# Altium PCB PCB1.PcbDoc
Units mm, origin at the board's own origin, x right, y up, seen from the top; angles counter-clockwise.
Board outline 143 x 100 mm, 2 copper layers (Top Layer, Bottom Layer); 59 components, 57 nets, 310 pads, 0 vias.
Unrouted connection lines stored in the file: 164.
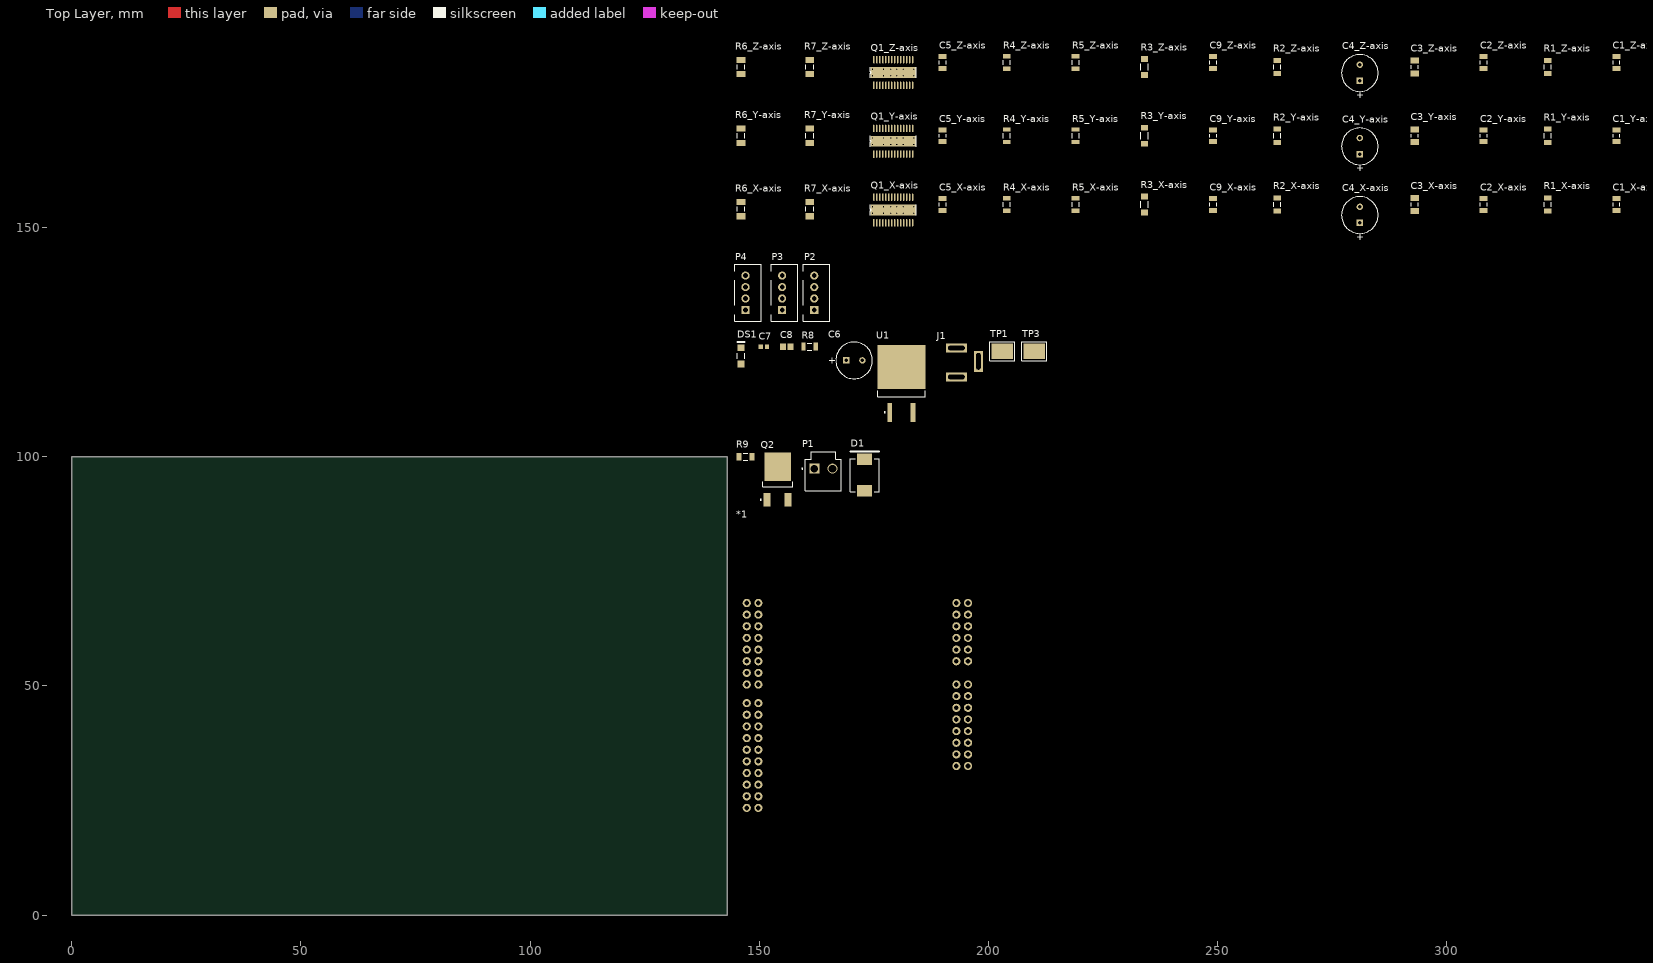
[diagram p0: Top Layer view]
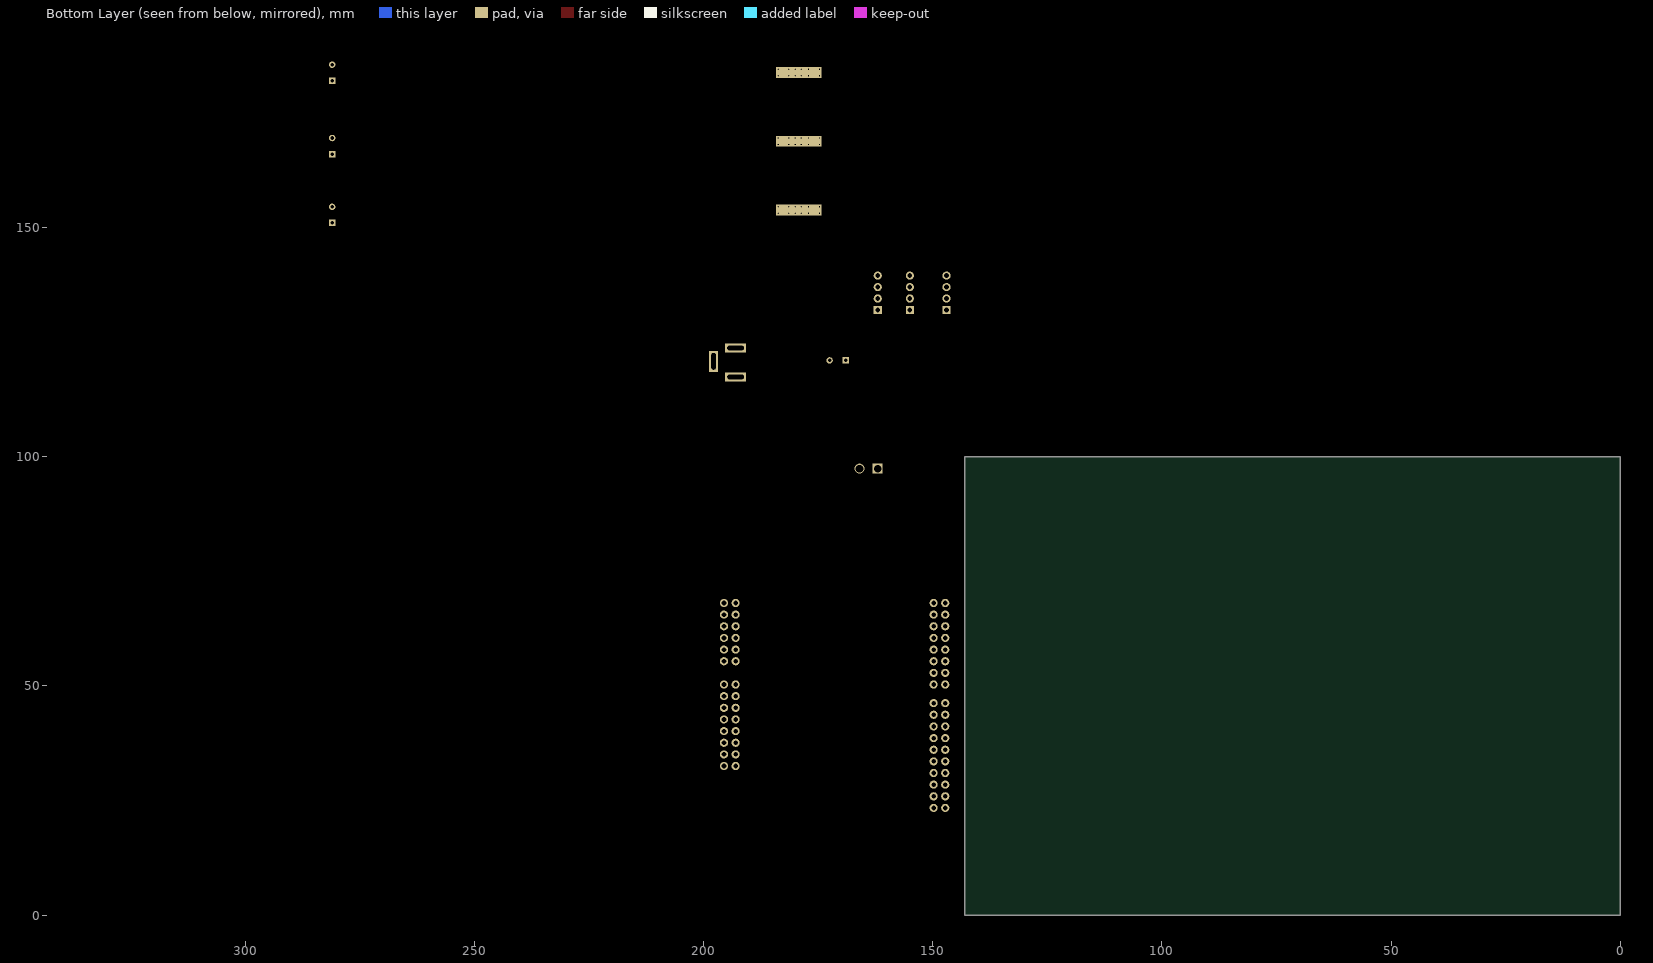
[diagram p1: Bottom Layer view, seen from below]

## Layer stack, top to bottom
Top Solder: solder mask 0.0102, Solder Resist, Dk 3.5
Top Layer: signal copper 0.0356
Dielectric 1: dielectric 0.32, FR-4, Dk 4.8
Bottom Layer: signal copper 0.0356
Bottom Solder: solder mask 0.0102, Solder Resist, Dk 3.5

## Board outline
0,100 143,100 143,0 0,0

## Design rules (kind name [scope] priority, off if disabled: settings)
Clearance [All] p1: gap=0.254 ignorepadtopadclearanceinfootprint=FALSE except(0: Arc-Hole Track-Hole SMDPad-Hole THPad-Hole Via-Hole Fill-Hole Poly-Hole Region-Hole Text-Hole)
PolygonConnect [All] p1: connectstyle=Relief reliefconductorwidth=0.254 reliefentries=4 polygonreliefangle="90 Angle" airgapwidth=0.254
RoomDefinition Z-axis [InComponentClass('Z-axis')] p1: confinementstyle=ConfineIn formatcopy=TRUE lockcomponents=FALSE outline 144,177 350,177 350,191 144,191
RoomDefinition Y-axis [InComponentClass('Y-axis')] p2: confinementstyle=ConfineIn formatcopy=TRUE lockcomponents=FALSE outline 144,161 350,161 350,176 144,176
RoomDefinition X-axis [InComponentClass('X-axis')] p3: confinementstyle=ConfineIn formatcopy=TRUE lockcomponents=FALSE outline 144,146 350,146 350,161 144,161
RoomDefinition Sheet_Symbol_Circuit [InComponentClass('Sheet_Symbol_Circuit')] p4: confinementstyle=ConfineIn formatcopy=TRUE lockcomponents=FALSE outline 144,129 166,129 166,145 144,145
RoomDefinition "P_S & R" [InComponentClass('P_S & R')] p5: confinementstyle=ConfineIn formatcopy=TRUE lockcomponents=FALSE outline 144,106 214,106 214,128 144,128
RoomDefinition M_B_S_C [InComponentClass('M_B_S_C')] p6: confinementstyle=ConfineIn formatcopy=TRUE lockcomponents=FALSE outline 144,88 177,88 177,105 144,105
RoomDefinition K22F [InComponentClass('K22F')] p7: confinementstyle=ConfineIn formatcopy=TRUE lockcomponents=FALSE outline 144,2 199,2 199,87 144,87
RoutingVias [All] p1: holewidth=0.711 width=1.27 viastyle="Through Hole" minholewidth=0.711 minwidth=1.27 maxholewidth=0.711 maxwidth=1.27
SolderMaskExpansion [All] p1: expansion=0.102 istentingtop=FALSE
Width [All] p1: maxlimit=0.254 minlimit=0.254 preferedwidth=0.254
30 further rules are at their usual default settings.

## Classes and differential pairs
channel class Stepper_Motor_IC_Circuit: X-axis Y-axis Z-axis
component class Z-axis: C1_Z-axis C2_Z-axis C3_Z-axis C4_Z-axis C5_Z-axis C9_Z-axis Q1_Z-axis R1_Z-axis R2_Z-axis R3_Z-axis R4_Z-axis R5_Z-axis R6_Z-axis R7_Z-axis
component class Y-axis: C1_Y-axis C2_Y-axis C3_Y-axis C4_Y-axis C5_Y-axis C9_Y-axis Q1_Y-axis R1_Y-axis R2_Y-axis R3_Y-axis R4_Y-axis R5_Y-axis R6_Y-axis R7_Y-axis
component class X-axis: C1_X-axis C2_X-axis C3_X-axis C4_X-axis C5_X-axis C9_X-axis Q1_X-axis R1_X-axis R2_X-axis R3_X-axis R4_X-axis R5_X-axis R6_X-axis R7_X-axis
component class Sheet_Symbol_Circuit: P2 P3 P4
component class "P_S & R": C6 C7 C8 DS1 J1 R8 TP1 TP3 U1
component class M_B_S_C: D1 P1 Q2 R9
component class K22F: *1

## Components (designator, comment, footprint, x,y, rotation, side; value= is the part's Value field where it differs from the comment)
*1 "*" FRDM-K22F 198.08,4.58 r90 top
C1_X-axis "C1206C103K5RACTU" KEMT-1206-2_L 337,155 r90 top (schematic designator C1)
C1_Y-axis "C1206C103K5RACTU" KEMT-1206-2_L 337,170 r90 top (schematic designator C1)
C1_Z-axis "C1206C103K5RACTU" KEMT-1206-2_L 337,186 r90 top (schematic designator C1)
C2_X-axis "C1206C103K5RACTU" KEMT-1206-2_L 308,155 r90 top (schematic designator C2)
C2_Y-axis "C1206C103K5RACTU" KEMT-1206-2_L 308,170 r90 top (schematic designator C2)
C2_Z-axis "C1206C103K5RACTU" KEMT-1206-2_L 308,186 r90 top (schematic designator C2)
C3_X-axis "1206C474K5RACTU" CAPC3216X100X50NL20T25 293,155 r90 top (schematic designator C3)
C3_Y-axis "1206C474K5RACTU" CAPC3216X100X50NL20T25 293,170 r90 top (schematic designator C3)
C3_Z-axis "1206C474K5RACTU" CAPC3216X100X50NL20T25 293,185 r90 top (schematic designator C3)
C4_X-axis "100uF, 50V" "Capacitor radial 8mm" 281,151 r90 top (schematic designator C4)
C4_Y-axis "100uF, 50V" "Capacitor radial 8mm" 281,166 r90 top (schematic designator C4)
C4_Z-axis "100uF, 50V" "Capacitor radial 8mm" 281,182 r90 top (schematic designator C4)
C5_X-axis "C1206C103K5RACTU" KEMT-1206-2_L 190,155 r90 top (schematic designator C5)
C5_Y-axis "C1206C103K5RACTU" KEMT-1206-2_L 190,170 r90 top (schematic designator C5)
C5_Z-axis "C1206C103K5RACTU" KEMT-1206-2_L 190,186 r90 top (schematic designator C5)
C6 "100uF, 50V" "Capacitor radial 8mm" 169,121 r0 top
C7 "330nF" CAPC1608X87X35NL15T15 151,124 r0 top
C8 "100nF" CAPC2013X88X50NL20T25 156,124 r0 top
C9_X-axis "C1206C103K5RACTU" KEMT-1206-2_L 249,155 r90 top (schematic designator C9)
C9_Y-axis "C1206C103K5RACTU" KEMT-1206-2_L 249,170 r90 top (schematic designator C9)
C9_Z-axis "C1206C103K5RACTU" KEMT-1206-2_L 249,186 r90 top (schematic designator C9)
D1 "S5BC-13-F" DIOD-S5xC_V 173,96 r90 top
DS1 "HSMH-C150" AVAG-HSMX-C150_V 146,122 r90 top
J1 "Barrel Jack 5.5x2.1mm" "Barrel Jack 2.1x5.5mm THT" 193,110 r0 top
P1 "B2P-VH(LF)(SN)" JST-B2P-VH(LF)(SN)_V 164,96 r0 top
P2 "B4B-XH-A (LF)(SN)" "B4B-XH-A (LF)(SN)" 162,132 r90 top
P3 "B4B-XH-A (LF)(SN)" "B4B-XH-A (LF)(SN)" 155,132 r90 top
P4 "B4B-XH-A (LF)(SN)" "B4B-XH-A (LF)(SN)" 147,132 r90 top
Q1_X-axis "DRV8825" "DRV8825 HTSSOP" 175,151 r90 top (schematic designator Q1)
Q1_Y-axis "DRV8825" "DRV8825 HTSSOP" 175,166 r90 top (schematic designator Q1)
Q1_Z-axis "DRV8825" "DRV8825 HTSSOP" 175,181 r90 top (schematic designator Q1)
Q2 "NTD6415ANLT4G" ONSC-DPAK-3-369AA-01_V 154,95 r90 top
R1_X-axis "ERJ-8ENF1004V" RESC3216X70X50NL05T20 322,155 r90 top (schematic designator R1)
R1_Y-axis "ERJ-8ENF1004V" RESC3216X70X50NL05T20 322,170 r90 top (schematic designator R1)
R1_Z-axis "ERJ-8ENF1004V" RESC3216X70X50NL05T20 322,185 r90 top (schematic designator R1)
R2_X-axis "51k R" RESC3216X60X45NL10T20 263,155 r90 top (schematic designator R2)
R2_Y-axis "51k R" RESC3216X60X45NL10T20 263,170 r90 top (schematic designator R2)
R2_Z-axis "51k R" RESC3216X60X45NL10T20 263,185 r90 top (schematic designator R2)
R3_X-axis "CR1206-FX-3002ELF" FP-CR1206-MFG 234,155 r90 top (schematic designator R3)
R3_Y-axis "CR1206-FX-3002ELF" FP-CR1206-MFG 234,170 r90 top (schematic designator R3)
R3_Z-axis "CR1206-FX-3002ELF" FP-CR1206-MFG 234,185 r90 top (schematic designator R3)
R4_X-axis "0.2R 5% 1206(3216)" RESC1206(3216)_L 204,155 r90 top value=0.2R (schematic designator R4)
R4_Y-axis "0.2R 5% 1206(3216)" RESC1206(3216)_L 204,170 r90 top value=0.2R (schematic designator R4)
R4_Z-axis "0.2R 5% 1206(3216)" RESC1206(3216)_L 204,186 r90 top value=0.2R (schematic designator R4)
R5_X-axis "0.2R 5% 1206(3216)" RESC1206(3216)_L 219,155 r90 top value=0.2R (schematic designator R5)
R5_Y-axis "0.2R 5% 1206(3216)" RESC1206(3216)_L 219,170 r90 top value=0.2R (schematic designator R5)
R5_Z-axis "0.2R 5% 1206(3216)" RESC1206(3216)_L 219,186 r90 top value=0.2R (schematic designator R5)
R6_X-axis "10K 5% 1206(3216)" RESC1206(3216)_M 146,154 r90 top value=10kR (schematic designator R6)
R6_Y-axis "10K 5% 1206(3216)" RESC1206(3216)_M 146,170 r90 top value=10kR (schematic designator R6)
R6_Z-axis "10K 5% 1206(3216)" RESC1206(3216)_M 146,185 r90 top value=10kR (schematic designator R6)
R7_X-axis "10K 5% 1206(3216)" RESC1206(3216)_M 161,154 r90 top value=10kR (schematic designator R7)
R7_Y-axis "10K 5% 1206(3216)" RESC1206(3216)_M 161,170 r90 top value=10kR (schematic designator R7)
R7_Z-axis "10K 5% 1206(3216)" RESC1206(3216)_M 161,185 r90 top value=10kR (schematic designator R7)
R8 "560R 5% 1206(3216)" RESC1206(3216)_L 161,124 r0 top value=560R
R9 "51kR" RESC3216X60X45NL10T20 147,100 r0 top
TP1 "5016" KEYSTONE-5016_V 203,123 r0 top
TP3 "5016" KEYSTONE-5016_V 210,123 r0 top
U1 "L7805CD2T-TR" TO-263_M 181,116 r90 top

## Footprints (in the part's own frame and the unit in brackets; to place one, negate y for a bottom-side part, rotate by r counter-clockwise, add the part's x,y. Pads: shape width x height; smd on the part's side, far side on the other; paste and mask are expansions set on the pad)
AVAG-HSMX-C150_V [mm] "SMD, 2-Leads, Body 3.2x1.6mm"
  rect 1.5x1.5 smd: 1(-1.75,0) 2(1.75,0)
  silkscreen extent -0.6,-0.8 3,0.8, body extent -1.6,-0.8 1.6,0.8, height 1.1
"B4B-XH-A (LF)(SN)" [mil] "B4B-XH-A (LF)(SN) Wire-To-Board Connector, Vertical, 2.5 mm, 4 Contacts"
  rect 70x70 hole 40: 1(0,0)
  round 70 hole 40: 2(98.43,0) 3(196.85,0) 4(295.28,0)
  silkscreen extent -96,-134 392,93, body extent -97,-134 391,92, height 276
"Barrel Jack 2.1x5.5mm THT" [mm] "GCT DCJ200-10-A-K1-K"
  rect 4.6x2 hole 1 slot 3.6 at 0 deg: 1(0,13.7) 2(0,7.4)
  rect 2x4.6 hole 1 slot 3.6 at 90 deg: 2(4.8,10.8)
  body extent -4.47,0 5.07,14.3, height 11
"Capacitor radial 8mm" [mm] "Radial electrolytic cap, 8mm body, 3.5mm pin separation"
  rect 1.4x1.4 hole 0.8: 1(0,0)
  round 1.4 hole 0.8: 2(3.5,0)
  silkscreen extent -2.3,-4 5.7,4, body extent -2.2,-4 5.8,4, height 11.5
CAPC1608X87X35NL15T15 [mm] "Chip Capacitor, 2-Leads, Body 1.60x0.80mm, IPC Medium Density"
  rect 0.9x1 smd: 1(-0.675,0) 2(0.675,0)
  body extent -0.87,-0.48 0.87,0.47, height 0.87
CAPC2013X88X50NL20T25 [mm] "Chip Capacitor, 2-Leads, Body 2.00x1.25mm, IPC Medium Density"
  rect 1.3x1.45 smd: 1(-0.8,0) 2(0.8,0)
  body extent -1.1,-0.72 1.1,0.72, height 0.88
CAPC3216X100X50NL20T25 [mm] "Chip Capacitor, 2-Leads, Body 3.20x1.60mm, IPC Medium Density"
  rect 1.3x1.8 smd: 1(-1.4,0) 2(1.4,0)
  silkscreen extent -0.35,-0.8 0.35,0.8, body extent -1.7,-0.9 1.7,0.9, height 1
DIOD-S5xC_V [mm] "Molded Diode, 2-Leads, Body 7.11x6.22mm"
  rect 2.5x3.3 smd: 1(-3.4,0) 2(3.4,0)
  silkscreen extent -3.6,-3.15 5.15,3.15, body extent -3.77,-3.11 3.77,3.11, height 2.5
"DRV8825 HTSSOP" [mm]
  rect 1.6x0.3 smd paste+0 mask+0.07: 1(0,0)
  oval 1.6x0.3 smd paste+0 mask+0.07: 2(0,-0.65) 3(0,-1.3) 4(0,-1.95) 5(0,-2.6) 6(0,-3.25) 7(0,-3.9) 8(0,-4.55) 9(0,-5.2) 10(0,-5.85) 11(0,-6.5) 12(0,-7.15) 13(0,-7.8) 14(0,-8.45) 15(5.6,-8.45) 16(5.6,-7.8) 17(5.6,-7.15) 18(5.6,-6.5) 19(5.6,-5.85) 20(5.6,-5.2) 21(5.6,-4.55) 22(5.6,-3.9) 23(5.6,-3.25) 24(5.6,-2.6) 25(5.6,-1.95) 26(5.6,-1.3) 27(5.6,-0.65) 28(5.6,0)
  round 0.6 hole 0.3: PPAD(2.1,-2.1) PPAD(2.1,0.3) PPAD(2.1,-8.7) PPAD(2.1,-6.4) PPAD(2.1,-5) PPAD(2.1,-3.7) PPAD(3.5,-5) PPAD(3.5,-3.7) PPAD(3.5,-2.1) PPAD(3.5,0.3) PPAD(3.5,-8.7) PPAD(3.5,-6.4)
  rect 2.34x5.18 smd paste+0: PPAD(2.8,-4.225)
  rect 2.34x10 smd paste-100 mask-100: PPAD(2.8,-4.225)
  rect 2.34x10 smd far side paste-100 mask-100: PPAD(2.8,-4.225)
  Top Layer region: 1.1,0.9
  silkscreen extent 1.63,-9.23 3.98,0.77, body extent -0.65,-9.34 6.25,0.87, height 1.11
FP-CR1206-MFG [mm]
  rect 1.25x1.5 smd paste+0 mask+0: 1(-1.725,0) 2(1.725,0)
  silkscreen extent -0.72,-0.82 0.72,0.82, body extent -2.45,-0.92 2.45,0.92, height 0.25
FRDM-K22F [mil] "NXP FRDM-K22F development board"
  round 70 hole 40: J1_1(2500,1900) J1_2(2500,2000) J1_3(2400,1900) J1_4(2400,2000) J1_5(2300,1900) J1_6(2300,2000) J1_7(2200,1900) J1_8(2200,2000) J1_9(2100,1900) J1_10(2100,2000) J1_11(2000,1900) J1_12(2000,2000) J1_13(1900,1900) J1_14(1900,2000) J1_15(1800,1900) J1_16(1800,2000) J2_1(1640,1900) J2_2(1640,2000) J2_3(1540,1900) J2_4(1540,2000) J2_5(1440,1900) J2_6(1440,2000) J2_7(1340,1900) J2_8(1340,2000) J2_9(1240,1900) J2_10(1240,2000) J2_11(1140,1900) J2_12(1140,2000) J2_13(1040,1900) J2_14(1040,2000) J2_15(940,1900) J2_16(940,2000) J2_17(840,1900) J2_18(840,2000) J2_19(740,1900) J2_20(740,2000) J24_1(2000,200) J24_2(2000,100) J24_3(2100,200) J24_4(2100,100) J24_5(2200,200) J24_6(2200,100) J24_7(2300,200) J24_8(2300,100) J24_9(2400,200) J24_10(2400,100) J24_11(2500,200) J24_12(2500,100) J25_1(1100,200) J25_2(1100,100) J25_3(1200,200) J25_4(1200,100) J25_5(1300,200) J25_6(1300,100) J25_7(1400,200) J25_8(1400,100) J25_9(1500,200) J25_10(1500,100) J25_11(1600,200) J25_12(1600,100) J25_13(1700,200) J25_14(1700,100) J25_15(1800,200) J25_16(1800,100)
  body extent 690,50 2550,2050, height 335
JST-B2P-VH(LF)(SN)_V [mm] "THD, 2-Leads, Body 8.5x7.86mm, Pitch 3.96mm"
  rect 2.15x2.15 hole 1.65: 1(-1.98,1.4)
  round 2.15 hole 1.65: 2(1.98,1.4)
  silkscreen extent -4.7,-3.4 3.93,5.1, body extent -3.93,-3.2 3.93,5.3, height 10.9
KEMT-1206-2_L [mm] "SMD, 2-Leads, Body 3.4x1.8mm, IPC High Density"
  rect 1.1x1.7 smd: 1(-1.3,0) 2(1.3,0)
  silkscreen extent -0.35,-0.75 0.35,0.75, body extent -1.7,-0.9 1.7,0.9, height 0.88
KEYSTONE-5016_V [mm] "Testpoint, Body 3.81x2.04 mm"
  rect 4.7x3.43 smd: 1(0,0)
  silkscreen extent -2.75,-2.12 2.75,2.11, body extent -1.9,-1.02 1.9,1.02, height 2.29
ONSC-DPAK-3-369AA-01_V [mm] "DPAK, 3-Leads, Body 6.54x6.095mm, Pitch 2.29mm"
  rect 3x1.6 smd: 1(-4.4,2.29) 3(-4.4,-2.29)
  rect 6.2x5.8 smd: 4(2.8,0)
  silkscreen extent -4.52,-3.27 -0.45,3.76, body extent -1.6,-3.27 4.49,3.27, height 2.47
RESC1206(3216)_L [mm] "Chip Resistor, Body 3.2x1.6mm, IPC High Density"
  rect 0.95x1.7 smd: 1(-1.35,0) 2(1.35,0)
  silkscreen extent -0.5,-0.75 0.5,0.75, body extent -1.67,-0.87 1.67,0.87, height 0.75
RESC1206(3216)_M [mm] "Chip Resistor, Body 3.2x1.6mm, IPC Low Density"
  rect 1.35x1.9 smd: 1(-1.55,0) 2(1.55,0)
  silkscreen extent -0.5,-0.85 0.5,0.85, body extent -1.67,-0.87 1.67,0.87, height 0.75
RESC3216X60X45NL10T20 [mm] "Chip Resistor, 2-Leads, Body 3.20x1.60mm, IPC Medium Density"
  rect 1.1x1.7 smd: 1(-1.45,0) 2(1.45,0)
  silkscreen extent -0.5,-0.75 0.5,0.75, body extent -1.65,-0.85 1.65,0.85, height 0.6
RESC3216X70X50NL05T20 [mm] "Chip Resistor, 2-Leads, Body 3.20x1.60mm, IPC Medium Density"
  rect 1.1x1.65 smd: 1(-1.425,0) 2(1.425,0)
  silkscreen extent -0.5,-0.72 0.5,0.72, body extent -1.63,-0.82 1.62,0.82, height 0.7
TO-263_M [mm] "D2-PAK, 4-Leads, Body 9.2x10.2mm, Pitch 2.54mm, Lead Span 15.4mm, IPC Low Density"
  rect 4.1x1.05 smd: 1(-6.35,2.54) 3(-6.35,-2.54)
  rect 9.6x10.45 smd: 4(3.6,0)
  silkscreen extent -6.47,-5.2 -1.6,5.2, body extent -2.9,-5.2 6.45,5.2, height 4.6

## Part data
*1: library part "NXP FRDM-K22F"
C1_X-axis C1_Y-axis C1_Z-axis C2_X-axis C2_Y-axis C2_Z-axis C9_X-axis C9_Y-axis C9_Z-axis: library part CMP-2000-06008-1, "Surface Mount Multilayer Ceramic Chip Capacitor, X7R Dielectric, 50 V, -55 to 125 degC, 2-Pin SMD (1206), RoHS, Tape and Reel", Capacitance=0.1uF, Case Size=1206(3216mm), Manufacturer=Kemet, Package Description="2-Leads SMD, Body 3.2 x 1.6 mm", Package Reference=1206-2, Temperature Coefficient=X7R, Tolerance=10%, Voltage Rating=50V, Brand/Series=CSeries, Datasheet URL=https://datasheet.ciiva.com/7729/1725435-7729792.pdf, Datasheet Version=07/2013, Dimensions="0.126\"x0.063\"(3.2x1.6mm)LxW", Manufacturer URL=http://www.kemet.com/, Material, Element=Ceramic, Mounting Technology=SurfaceMount, Mounting Type=PCB, Termination=SMD
C3_X-axis C3_Y-axis C3_Z-axis: library part CMP-2000-06016-1, "Chip Capacitor, 470 nF, +/- 10%, 50 V, -55 to 125 degC, 1206 (3216 Metric), RoHS, Tape and Reel", Capacitance - nF=470nF, Capacitance - pF=470000pF, Case Code - in=1206, Case Code - mm=3216, Case Height=0.9mm, Case Length=3.2mm, Case Width=1.6mm, Dielectric=X7R, Manufacturer=Kemet, Maximum Operating Temperature=+125C, Minimum Operating Temperature=-55C, Operating Temperature Range=-55Cto+125C, Package / Case=1206(3216metric), Package Description="2-Pin Surface Mount Device, Body 3.2 x 1.6 mm", Temperature Coefficient / Code=+/-15%, Tolerance=10%, Voltage Rating=50V, Brand=Kemet, Class=2, Datasheet URL=http://www.kemet.com/docfinder?Partnumber=C1206C106K8RACTU, Datasheet Version=02/2016, Dimensions=1.6mmWx3.2mmLx0.9mmH, Factory Pack Quantity=4000, Manufacturer URL=http://www.kemet.com/, Mounting Technology=SurfaceMount, Package Reference=1206, Packaging=Reel, Product=GeneralTypeMLCCs, Product Category=MultilayerCeramicCapacitorsMLCC-SMD/SMT, RoHS=Details, Series=C1206C, Termination Style=SMD/SMT, Type=SMDMLCCsX7R,Commercial, Voltage Rating DC=50V
C4_X-axis C4_Y-axis C4_Z-axis C6: library part "Cap 100uF, 50V, THT radial", "Electrolytic Capacitor, 100 µF, 50 V, ± 20%, Radial Leaded, 8 mm"
C5_X-axis C5_Y-axis C5_Z-axis: library part CMP-2000-06008-1, "Surface Mount Multilayer Ceramic Chip Capacitor, X7R Dielectric, 50 V, -55 to 125 degC, 2-Pin SMD (1206), RoHS, Tape and Reel", Capacitance=0.01uF, Case Size=1206(3216mm), Manufacturer=Kemet, Package Description="2-Leads SMD, Body 3.2 x 1.6 mm", Package Reference=1206-2, Temperature Coefficient=X7R, Tolerance=10%, Voltage Rating=50V, Brand/Series=CSeries, Datasheet URL=https://datasheet.ciiva.com/7729/1725435-7729792.pdf, Datasheet Version=07/2013, Dimensions="0.126\"x0.063\"(3.2x1.6mm)LxW", Manufacturer URL=http://www.kemet.com/, Material, Element=Ceramic, Mounting Technology=SurfaceMount, Mounting Type=PCB, Termination=SMD
C7: library part CMP-2006-03186-1, "C0603C334K4RACTU", Manufacturer=Kemet, Part Number=C0603C334K4RACTU
C8: library part CMP-2007-00279-1, "C0805C104K5RACTU", Manufacturer=Kemet, Part Number=C0805C104K5RACTU
D1: library part CMP-2000-07025-1, "Surface Mount Glass Passivated Rectifier, 5 A, 100 V, -65 to 150 degC, 2-Pin SMC, RoHS, Tape and Reel", Average Rectified Current-Max=5A, Forward Voltage=1.15V, Manufacturer="Diodes Inc", Package Description="2-Pin Molded Component, Body 6.855 x 5.905 mm", Package Reference=S5xC, Peak Current-Max=100A, Reverse Current-Max=10µA, Reverse Voltage-Max [Vrrm]=100V, Datasheet URL=http://www.diodes.com/_files/datasheets/ds16007.pdf, Datasheet Version="Rev. 9-2, 09/2010", Manufacturer URL=http://www.diodes.com/, Mounting Technology=SurfaceMount
DS1: library part CMP-2000-06426-1, "LED Uni-Color Red, 65 mW, 25 mA, -40 to 85 degC, 2-Pin SMD, RoHS, Tape and Reel", Emitting Color=Red, Forward Current=25mA, Forward Voltage=2.6V, Manufacturer=Avago, Operating Temp Range=-40Cto85C, Operating Temperature Classification=Industrial, Package Description="2-Pin Surface Mount Device, Body 3.2 x 1.6 mm", Package Reference=HSMX-C150, Package Type=ChipLed, Power Dissipation=78W, Reverse Voltage=5V, Test Current (It)=20mA, Chip Material=GaAlAs, Datasheet URL=http://media.digikey.com/pdf/Data%20Sheets/Avago%20PDFs/HSMz-Czzz.pdf, Datasheet Version=03/2012, DELETED=Compliant, Dominant Wave Length=639nm, High Brightness=No, Lens Dimensions=2x1.6x0.6mm, Lens Type=ColorlessDiffused, Lum Intensity=17mcd, Luminous Intensity=17mcd, Main Category=ChipLED, Manufacturer URL=http://www.avagotech.com/, Mounting=SurfaceMount, Mounting Technology=SurfaceMount, Number of  Elements=1, Packaging=TapeandReel, Peak Wavelength=660nm, Pin Count=2, Product Depth (mm)=1.6mm, Product Height (mm)=1.1mm, Product Length (mm)=3.2mm, Rad Hardened=No, Shape Type=Rectangular, Type=Uni-Color, Viewing Angle=170deg
J1: "GCT DCJ200-10-A-K1-K"
P1: library part CMP-1755-00002-1, "Male Header, Pitch 3.96 mm, 1 x 2 Position, Height 10.9 mm, Tail Length 3.7 mm, -25 to 85 degC, RoHS, Bulk", Capacitance="27 pF", Case Code (Imperial)=0603, Case Code (Metric)=1608, Max Operating Temperature=125degC, Min Operating Temperature=-55degC, Package Quantity=4000, Resistance="100000000000 Ohm", Tolerance=5%, Type (Capacitors)=C0G, Voltage Rating="50 V", Case/Package=0603, ComponentLink1Description="Manufacturer URL", ComponentLink1URL=http://www.jst.com/home2.html, ComponentLink2Description=Datasheet, ComponentLink2URL=http://www.jst-mfg.com/product/pdf/eng/eVH.pdf, DatasheetVersion=May-16, Height="0.8 mm", Length="1.6 mm", Mount="Surface Mount", PackageDescription="Male Header, Pitch 3.96 mm, 1 x 2 Position, Height 10.9 mm, Tail Length 3.7 mm", PackageReference=B2P-VH(LF)(SN), Packaging="Tape and Reel", Pins=2, Radiation Hardening=No, REACH SVHC="No SVHC", RoHSCompliant=True, Voltage Rating (DC)="50 V", Width="0.8 mm"
P2 P3 P4: library part "B4B-XH-A (LF)(SN) Wire-to-board connector", "Wire-to-board connector, vertical, 2.5mm, 4 contacts"
Q1_X-axis Q1_Y-axis Q1_Z-axis: library part "Stepper motor driver DRV8824", "TI DRV8825 Stepper Motor Controller IC"
Q2: library part CMP-1058-00352-1, "N-Channel Power MOSFET, 100 V, 23 A, 56 mOhm, 3-Pin DPAK, Pb-Free, Tape and Reel", Manufacturer="On Semiconductor", Package Type=DPAK-3, Channel Polarity="N Channel", Ciss Typ (pF)=1024, ComponentLink1Description="Manufacturer URL", ComponentLink1URL=http://www.onsemi.com/, ComponentLink2Description=Datasheet, ComponentLink2URL=http://www.onsemi.cn/pub_link/Collateral/NTD6415ANL-D.PDF, ComponentLink3Description="Package Specification", ComponentLink3URL=http://www.onsemi.cn/pub_link/Collateral/369AA.PDF, Configuration=Single, Coss Typ (pF)=156, Crss Typ (pF)=70, DatasheetVersion="Rev. 1", ID Max (A)=23, Mounting Technology="Surface Mount", PackageDescription="3-Pin Flange Mount, Body 6.54 x 6.095 mm, Pitch 2.29 mm", PackageReference=DPAK-3-369AA-01, PackageVersion="Rev. B, 06/2010", Packing="Tape and Reel", PartNumber=NTD6415ANLT4G, PD Max (W)=83, Qrr Typ (nC)=152, RoHS=Pb-Free, VGS Max (V)=20, VGS(th) Max (V)=2
R1_X-axis R1_Y-axis R1_Z-axis: library part CMP-2003-00020-1, Manufacturer=Panasonic, Resistance=1MR, Part Number=ERJ-8ENF1004V
R2_X-axis R2_Y-axis R2_Z-axis R9: library part CMP-2003-02261-1, "CRCW120651K0JNEA", Manufacturer="Vishay Dale", Part Number=CRCW120651K0JNEA
R3_X-axis R3_Y-axis R3_Z-axis: library part CMP-07231-000998-1, "Thick Film Chip Resistors 1206 30kΩ 0.25W 1% 100ppm/°C", Case Code (Imperial)=1206, Case Code (Metric)=3216, Max Operating Temperature=155°C, Max Power Dissipation=250mW, Min Operating Temperature=-55°C, Package Quantity=5000, Resistance=30kR, Temperature Coefficient=100ppm/°C, Tolerance=1%, Voltage Rating=200V, Case/Package=1206, Composition="Thick Film", Contact Plating=Tin, Depth=1.6mm, Height=0.03inch, Length=3.2mm, Military Standard=Not, Mount="Surface Mount", Number of Terminations=2, Packaging="Tape and Reel", Power Rating=250mW, Radiation Hardening=No, Termination=SMD/SMT, Thickness=610um, Width=1.6mm
R4_X-axis R4_Y-axis R4_Z-axis R5_X-axis R5_Y-axis R5_Z-axis: library part CMP-1014-00057-1, "0.2R 0.25W 5% 1206 (3216 Metric)  SMD", Case-EIA=1206, Case-Metric=3216, Power="0.25 W", Tolerance="5 %", Technology=SMT
R6_X-axis R6_Y-axis R6_Z-axis R7_X-axis R7_Y-axis R7_Z-axis: library part CMP-1014-00098-1, "10K 0.25W 5% 1206 (3216 Metric)  SMD", Case-EIA=1206, Case-Metric=3216, Power="0.25 W", Tolerance="5 %", Technology=SMT
R8: library part CMP-1014-00068-1, "560R 0.25W 5% 1206 (3216 Metric)  SMD", Case-EIA=1206, Case-Metric=3216, Power="0.25 W", Tolerance="5 %", Technology=SMT
TP1 TP3: library part CMP-2000-05178-1, "Test Point, 1-Pin SMT, RoHS, Tape and Reel", Manufacturer=Keystone, Package Description="1-Pin Test Point, Body 3.81 x 2.04 mm", Standard Package=1, Catalog Drawings="5016Top /  / 5016Side /  / 5016Front", Category=TestandMeasurement, Datasheet URL=https://ciiva.com/datasheet-click-2917613?src=ciiva&sig=4a4e90f, Datasheet Version="Rev. D, 03/2014", Family=TestPoints, Featured Product="SurfaceMountTestPoints /  / 5019MiniatureSurfaceMountTestPoint", Manufacturer URL=http://www.keyelco.com/, Material=PhosphorBronze, Mounting Type=SurfaceMount, Online Catalog=SurfaceMountTestPoints, Other Names=5016KDKR, Package Reference=5016, Packaging=Digi-Reel, RoHS Information=RoHSComplianceStatement, Terminal="0.015\"(0.38mm)PhosphorBronze,SilverPlated", Type=PCTestPoint,Compact
U1: library part CMP-0244-00213-1, "Positive Voltage Regulator, 3-Pin D2PAK, Tape and Reel", ComponentLink1Description="Manufacturer URL", ComponentLink1URL=http://www.st.com, ComponentLink2Description=Datasheet, ComponentLink2URL=http://www.st.com/internet/com/TECHNICAL_RESOURCES/TECHNICAL_LITERATURE/DATASHEET/CD00000444.pdf, DatasheetVersion=16/11/2011, PackageDescription="3-Pin Transistor Outline Package 2.54 mm Pitch, 15.4 mm Lead Span (D2PAK)", PackageReference=TO-263, PackageVersion=2011

## Nets (pads, with @x,y where several pads share a name; then routed paths per layer and width w, separated by ;. In a path a pad name is that pad's centre, name@x,y a point inside that pad or via, vN(x,y) a via of type N, cw(c..) or ccw(c..) an arc to the next point about the centre after c; other vN are vias at no path point)
DIR_1: *1.J1_14 Q1_X-axis.20
DIR_2: *1.J1_4 Q1_Y-axis.20
DIR_3: *1.J1_1 Q1_Z-axis.20
ENABLE: *1.J1_7 Q1_X-axis.21 Q1_Y-axis.21 Q1_Z-axis.21
FAULT_X: *1.J2_2 Q1_X-axis.18 R6_X-axis.2
FAULT_Y: *1.J24_4 Q1_Y-axis.18 R6_Y-axis.2
FAULT_Z: *1.J24_8 Q1_Z-axis.18 R6_Z-axis.2
GND: *1.J2_14 *1.J25_12 *1.J25_14 C2_X-axis.2 C2_Y-axis.2 C2_Z-axis.2 C3_X-axis.2 C3_Y-axis.2 C3_Z-axis.2 C4_X-axis.2 C4_Y-axis.2 C4_Z-axis.2 C6.2 C7.1 C8.1 C9_X-axis.2 C9_Y-axis.2 C9_Z-axis.2 DS1.2 J1.2 Q1_X-axis.14 Q1_X-axis.28 Q1_X-axis.PPAD Q1_Y-axis.14 Q1_Y-axis.28 Q1_Y-axis.PPAD Q1_Z-axis.14 Q1_Z-axis.28 Q1_Z-axis.PPAD Q2.3 R3_X-axis.1 R3_Y-axis.1 R3_Z-axis.1 R4_X-axis.2 R4_Y-axis.2 R4_Z-axis.2 R5_X-axis.2 R5_Y-axis.2 R5_Z-axis.2 R9.1 U1.4
HOME_X: *1.J2_7 Q1_X-axis.27 R7_X-axis.2
HOME_Y: *1.J1_10 Q1_Y-axis.27 R7_Y-axis.2
HOME_Z: *1.J1_15 Q1_Z-axis.27 R7_Z-axis.2
MODEL_0: *1.J2_10 Q1_X-axis.24 Q1_Y-axis.24 Q1_Z-axis.24
MODEL_1: *1.J2_8 Q1_X-axis.25 Q1_Y-axis.25 Q1_Z-axis.25
MODEL_2: *1.J2_6 Q1_X-axis.26 Q1_Y-axis.26 Q1_Z-axis.26
Net*1_J24_2: *1.J24_2 Q2.1 R9.2
Net*1_J25_16: *1.J25_16 C8.2 TP3.1 U1.3
NetC5_X-axis_1: C5_X-axis.1 Q1_X-axis.2
NetC5_X-axis_2: C5_X-axis.2 Q1_X-axis.1
NetC5_Y-axis_1: C5_Y-axis.1 Q1_Y-axis.2
NetC5_Y-axis_2: C5_Y-axis.2 Q1_Y-axis.1
NetC5_Z-axis_1: C5_Z-axis.1 Q1_Z-axis.2
NetC5_Z-axis_2: C5_Z-axis.2 Q1_Z-axis.1
NetD1_1: D1.1 P1.1 Q2.4
NetDS1_1: DS1.1 R8.1
NetP2_1: P2.1 Q1_X-axis.10
NetP2_2: P2.2 Q1_X-axis.8
NetP2_3: P2.3 Q1_X-axis.7
NetP2_4: P2.4 Q1_X-axis.5
NetP3_1: P3.1 Q1_Y-axis.10
NetP3_2: P3.2 Q1_Y-axis.8
NetP3_3: P3.3 Q1_Y-axis.7
NetP3_4: P3.4 Q1_Y-axis.5
NetP4_1: P4.1 Q1_Z-axis.10
NetP4_2: P4.2 Q1_Z-axis.8
NetP4_3: P4.3 Q1_Z-axis.7
NetP4_4: P4.4 Q1_Z-axis.5
NetQ1_X-axis_6: Q1_X-axis.6 R5_X-axis.1
NetQ1_X-axis_9: Q1_X-axis.9 R4_X-axis.1
NetQ1_X-axis_12: Q1_X-axis.12 Q1_X-axis.13 R2_X-axis.1 R3_X-axis.2
NetQ1_Y-axis_6: Q1_Y-axis.6 R5_Y-axis.1
NetQ1_Y-axis_9: Q1_Y-axis.9 R4_Y-axis.1
NetQ1_Y-axis_12: Q1_Y-axis.12 Q1_Y-axis.13 R2_Y-axis.1 R3_Y-axis.2
NetQ1_Z-axis_6: Q1_Z-axis.6 R5_Z-axis.1
NetQ1_Z-axis_9: Q1_Z-axis.9 R4_Z-axis.1
NetQ1_Z-axis_12: Q1_Z-axis.12 Q1_Z-axis.13 R2_Z-axis.1 R3_Z-axis.2
RESET: *1.J1_9 Q1_X-axis.16 Q1_Y-axis.16 Q1_Z-axis.16
SLEEP: *1.J1_5 Q1_X-axis.17 Q1_Y-axis.17 Q1_Z-axis.17
STEP_1: Q1_X-axis.22
STEP_2: *1.J1_2 *1.J1_12 Q1_Y-axis.22
STEP_3: *1.J1_3 Q1_Z-axis.22
V3P3OUT_X-axis: C3_X-axis.1 Q1_X-axis.15 R2_X-axis.2 R6_X-axis.1 R7_X-axis.1
V3P3OUT_Y-axis: C3_Y-axis.1 Q1_Y-axis.15 R2_Y-axis.2 R6_Y-axis.1 R7_Y-axis.1
V3P3OUT_Z-axis: C3_Z-axis.1 Q1_Z-axis.15 R2_Z-axis.2 R6_Z-axis.1 R7_Z-axis.1
VCP_X-axis: C1_X-axis.1 Q1_X-axis.3 R1_X-axis.1
VCP_Y-axis: C1_Y-axis.1 Q1_Y-axis.3 R1_Y-axis.1
VCP_Z-axis: C1_Z-axis.1 Q1_Z-axis.3 R1_Z-axis.1
VMA_X-axis: C1_X-axis.2 C1_Y-axis.2 C1_Z-axis.2 C2_X-axis.1 C2_Y-axis.1 C2_Z-axis.1 C4_X-axis.1 C4_Y-axis.1 C4_Z-axis.1 C6.1 C7.2 C9_X-axis.1 C9_Y-axis.1 C9_Z-axis.1 D1.2 J1.1 P1.2 Q1_X-axis.4 Q1_X-axis.11 Q1_Y-axis.4 Q1_Y-axis.11 Q1_Z-axis.4 Q1_Z-axis.11 R1_X-axis.2 R1_Y-axis.2 R1_Z-axis.2 R8.2 TP1.1 U1.1
pads on no net: *1.J1_6 *1.J1_8 *1.J1_11 *1.J1_13 *1.J1_16 *1.J2_1 *1.J2_3 *1.J2_4 *1.J2_5 *1.J2_9 *1.J2_11 *1.J2_12 *1.J2_13 *1.J2_15 *1.J2_16 *1.J2_17 *1.J2_18 *1.J2_19 *1.J2_20 *1.J24_1 *1.J24_3 *1.J24_5 *1.J24_6 *1.J24_7 *1.J24_9 *1.J24_10 *1.J24_11 *1.J24_12 *1.J25_1 *1.J25_2 *1.J25_3 *1.J25_4 *1.J25_5 *1.J25_6 *1.J25_7 *1.J25_8 *1.J25_9 *1.J25_10 *1.J25_11 *1.J25_13 *1.J25_15 Q1_X-axis.19 Q1_X-axis.23 Q1_Y-axis.19 Q1_Y-axis.23 Q1_Z-axis.19 Q1_Z-axis.23

## Text inside footprints (layer, text, board x,y; h text height)
C4_X-axis: Top Overlay "+" at 281.75,147 h1.52 r90
C4_Y-axis: Top Overlay "+" at 281.75,162 h1.52 r90
C4_Z-axis: Top Overlay "+" at 281.75,178 h1.52 r90
C6: Top Overlay "+" at 165,120.25 h1.52